# Altium PCB PICO核心.PcbDoc (part 1 of 2)
Units mil, origin at the board's own origin, x right, y up, seen from the top; angles counter-clockwise.
Board outline 3937.01 x 3543.31 mil, 4 copper layers (Top Layer, GND, VCC, Bottom Layer), stack 23.756 mil thick; 147 components, 105 nets, 477 pads, 202 vias.
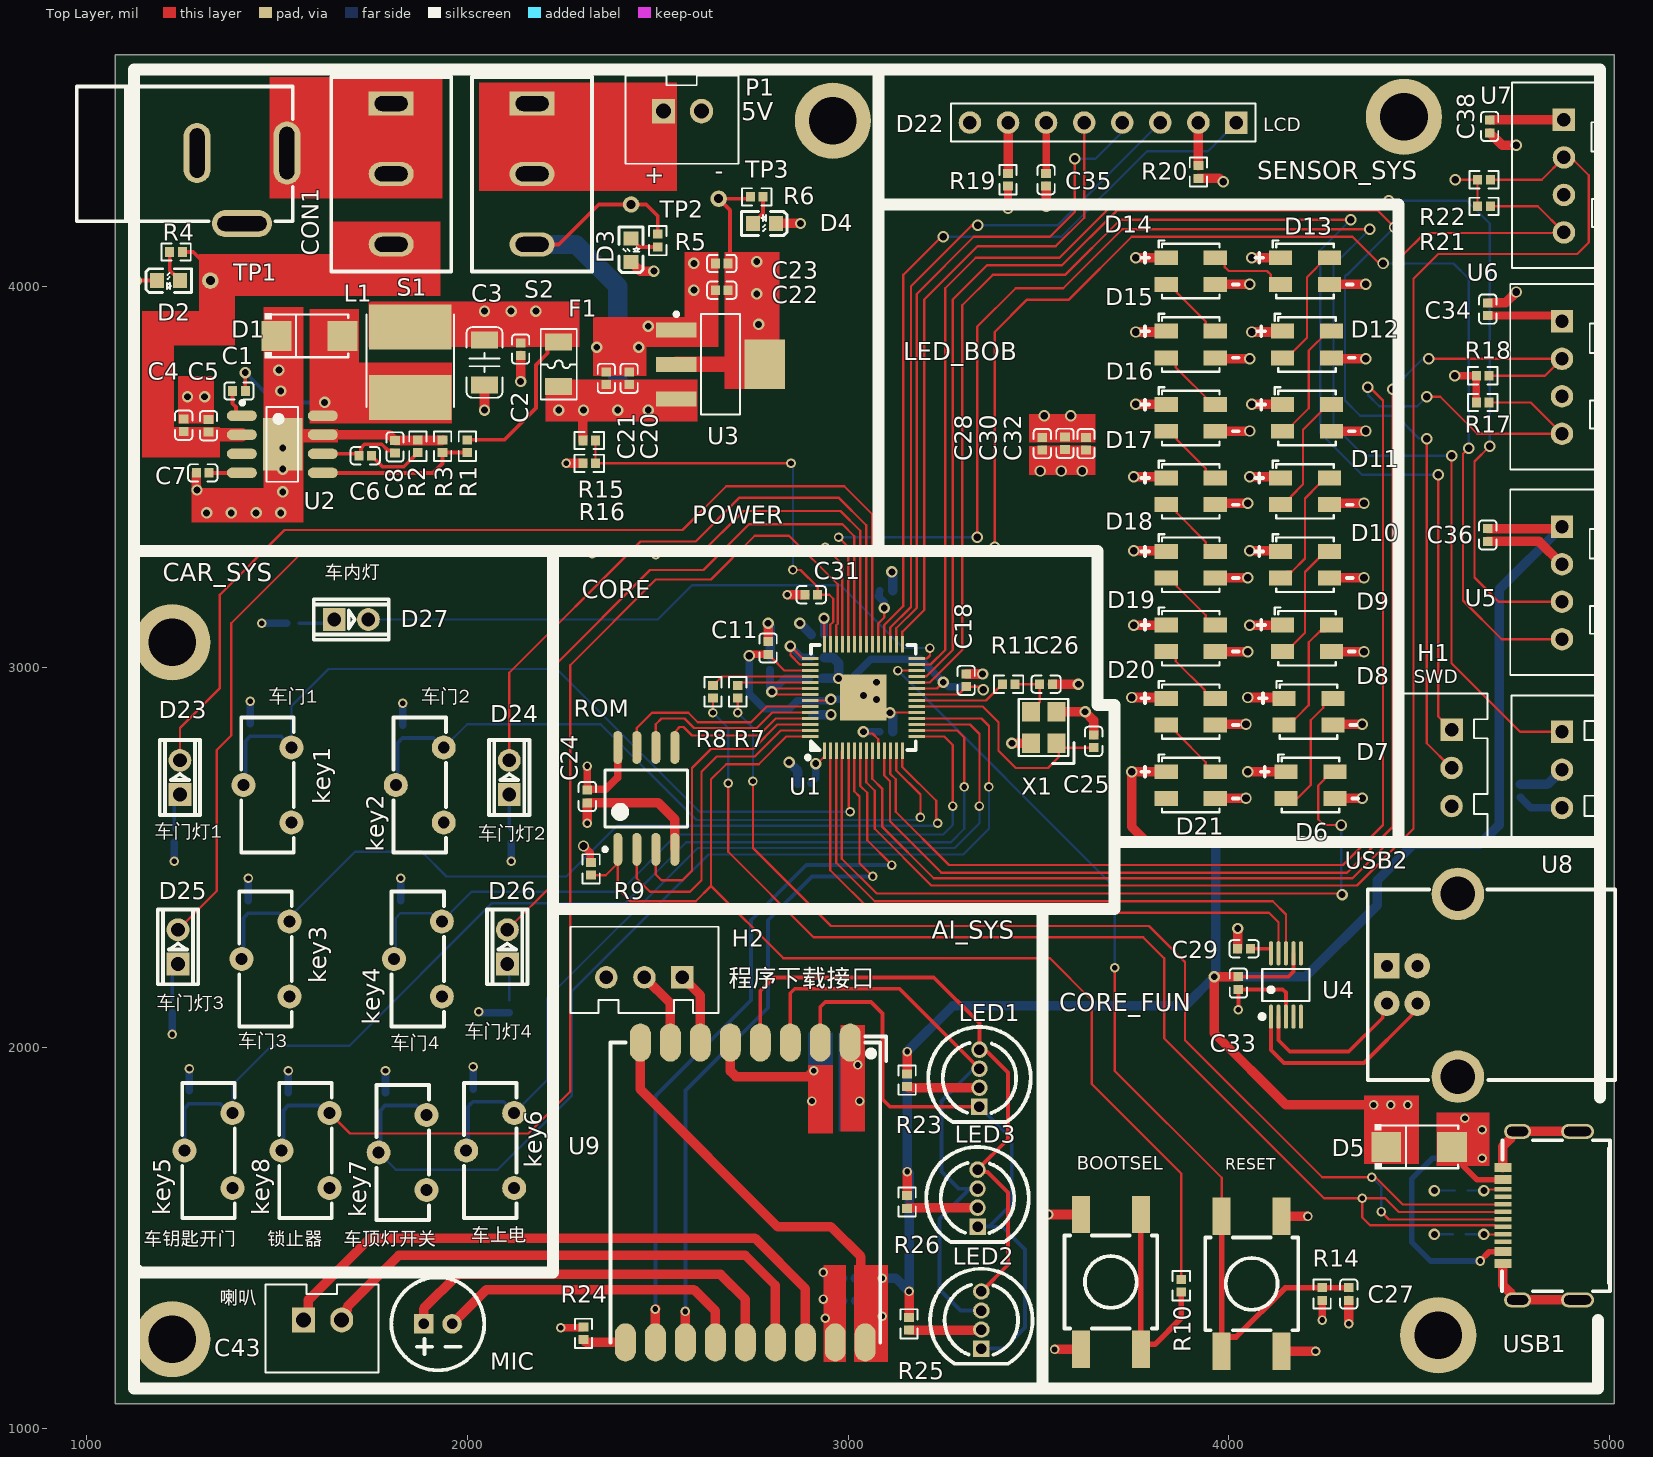
[diagram p0: Top Layer view]
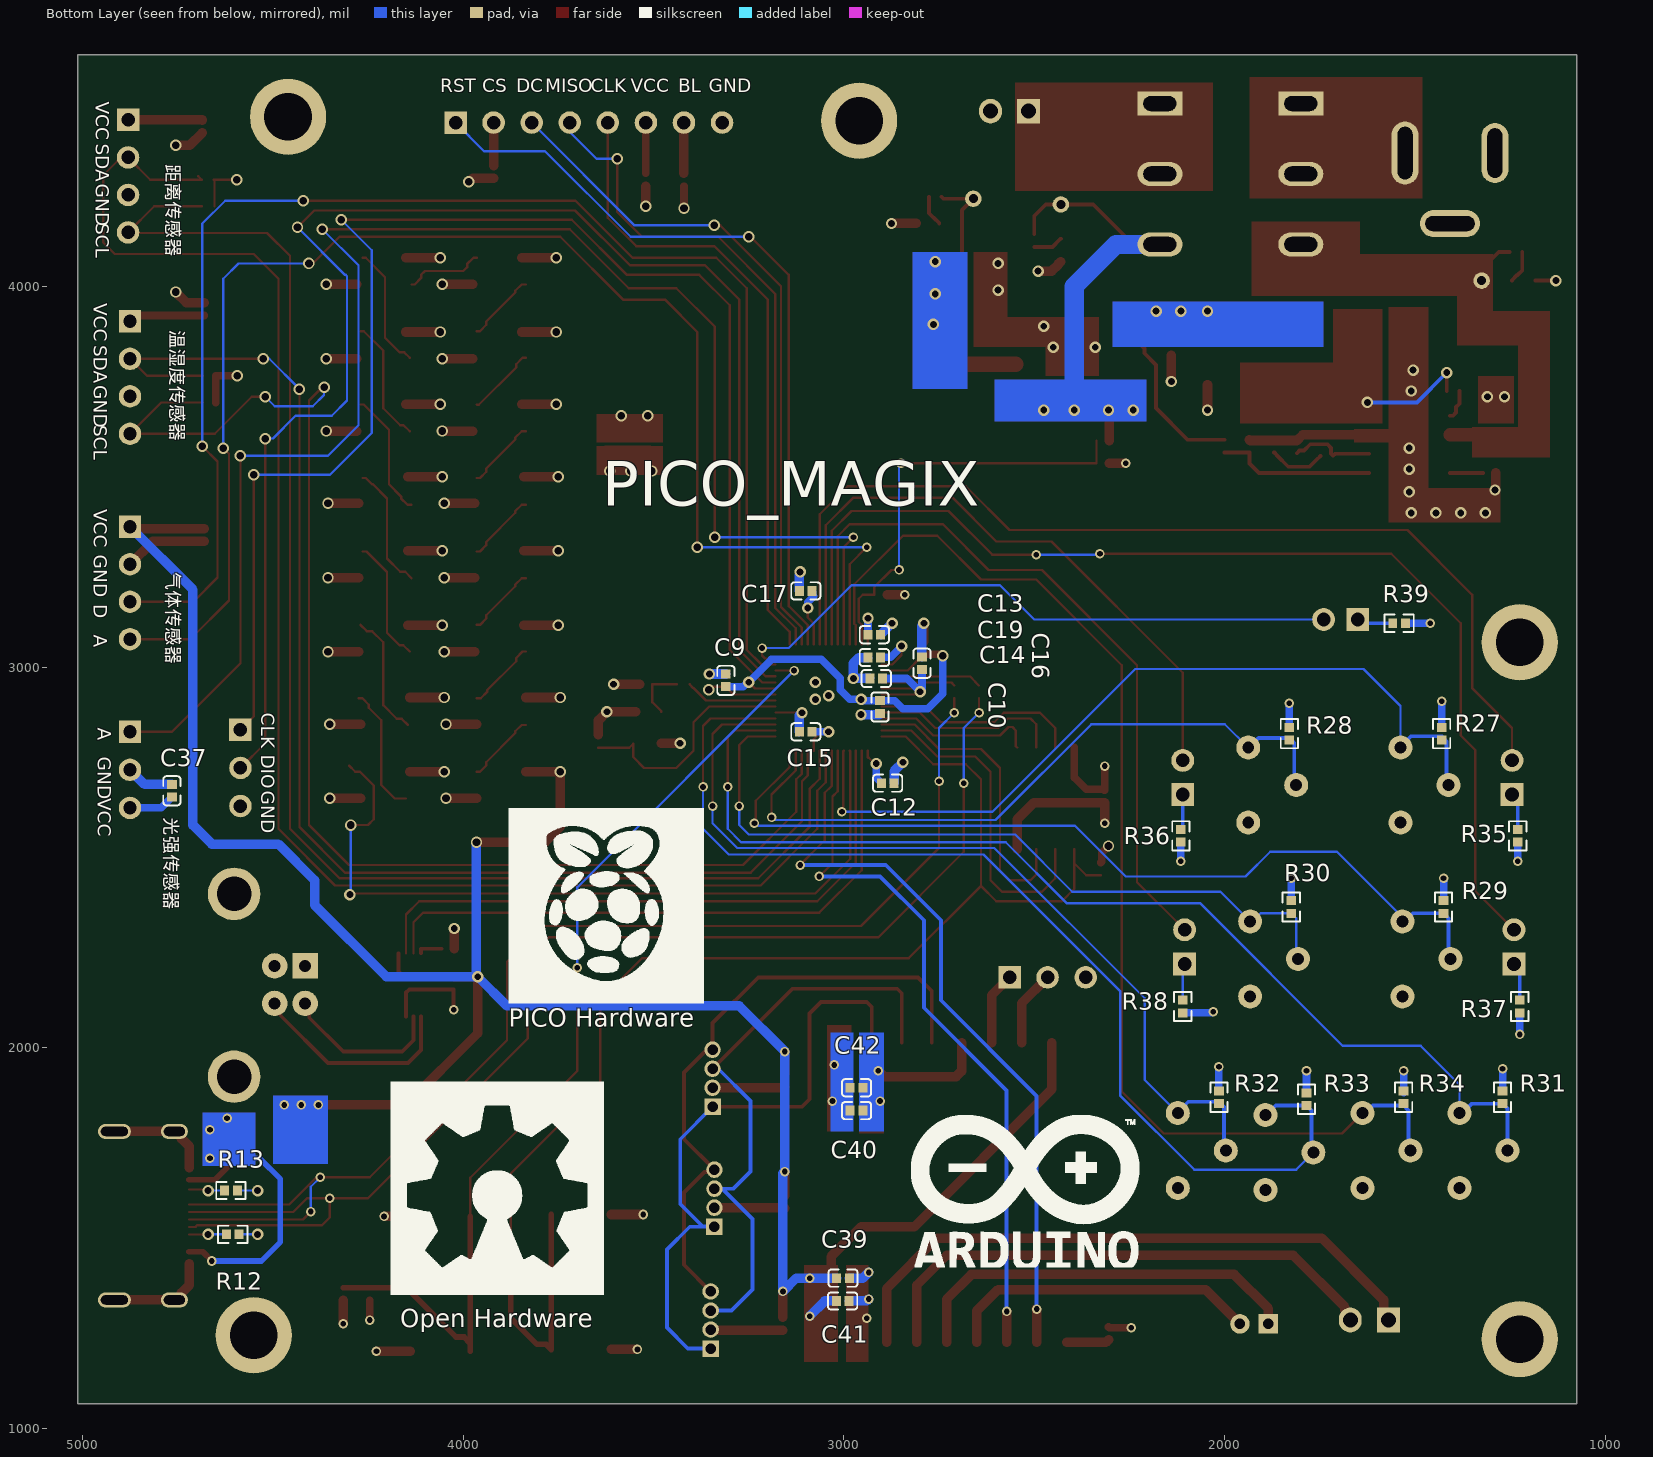
[diagram p1: Bottom Layer view, seen from below]
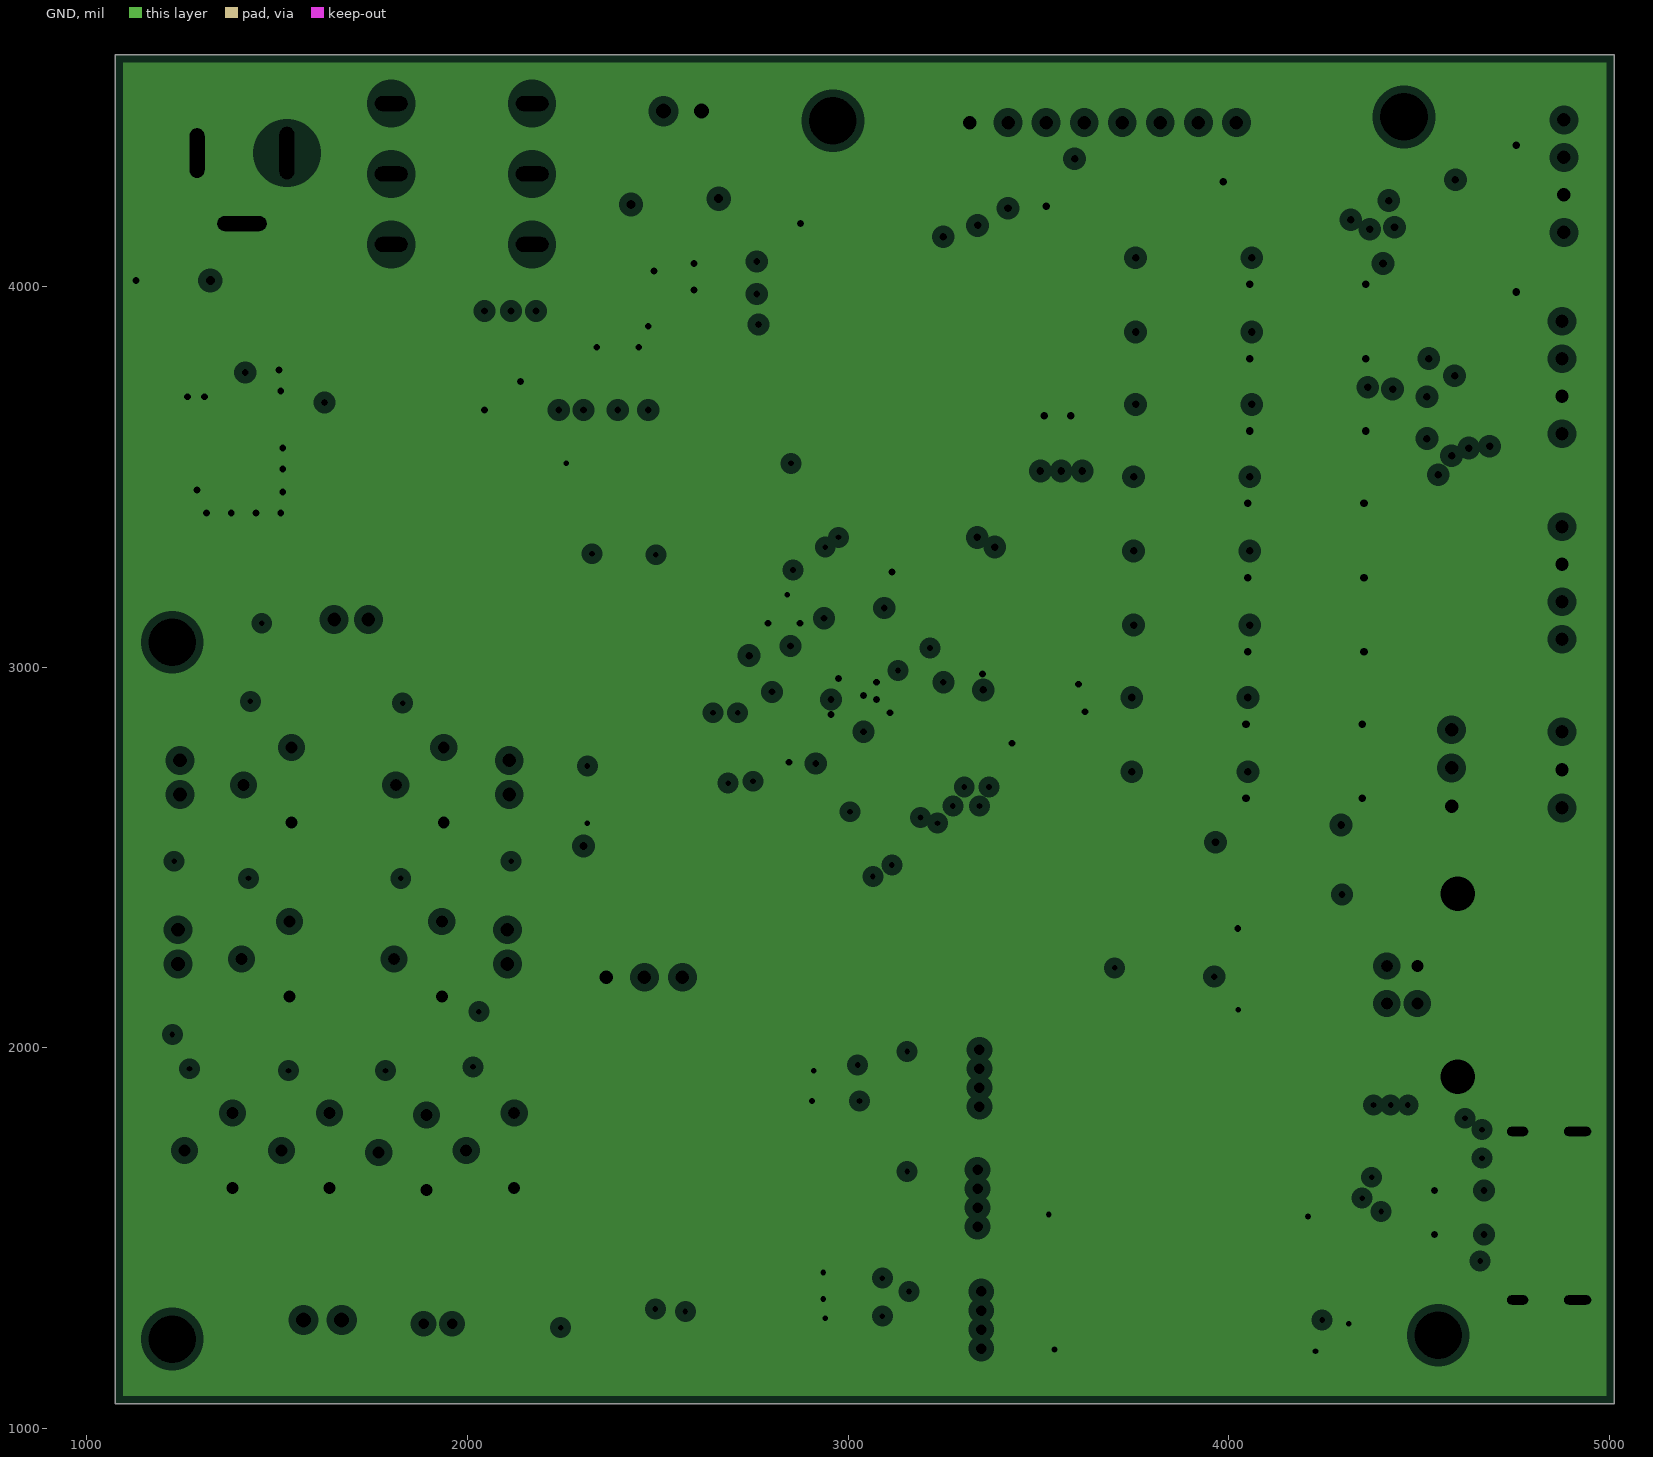
[diagram p2: GND, clearances drawn from the general rule]
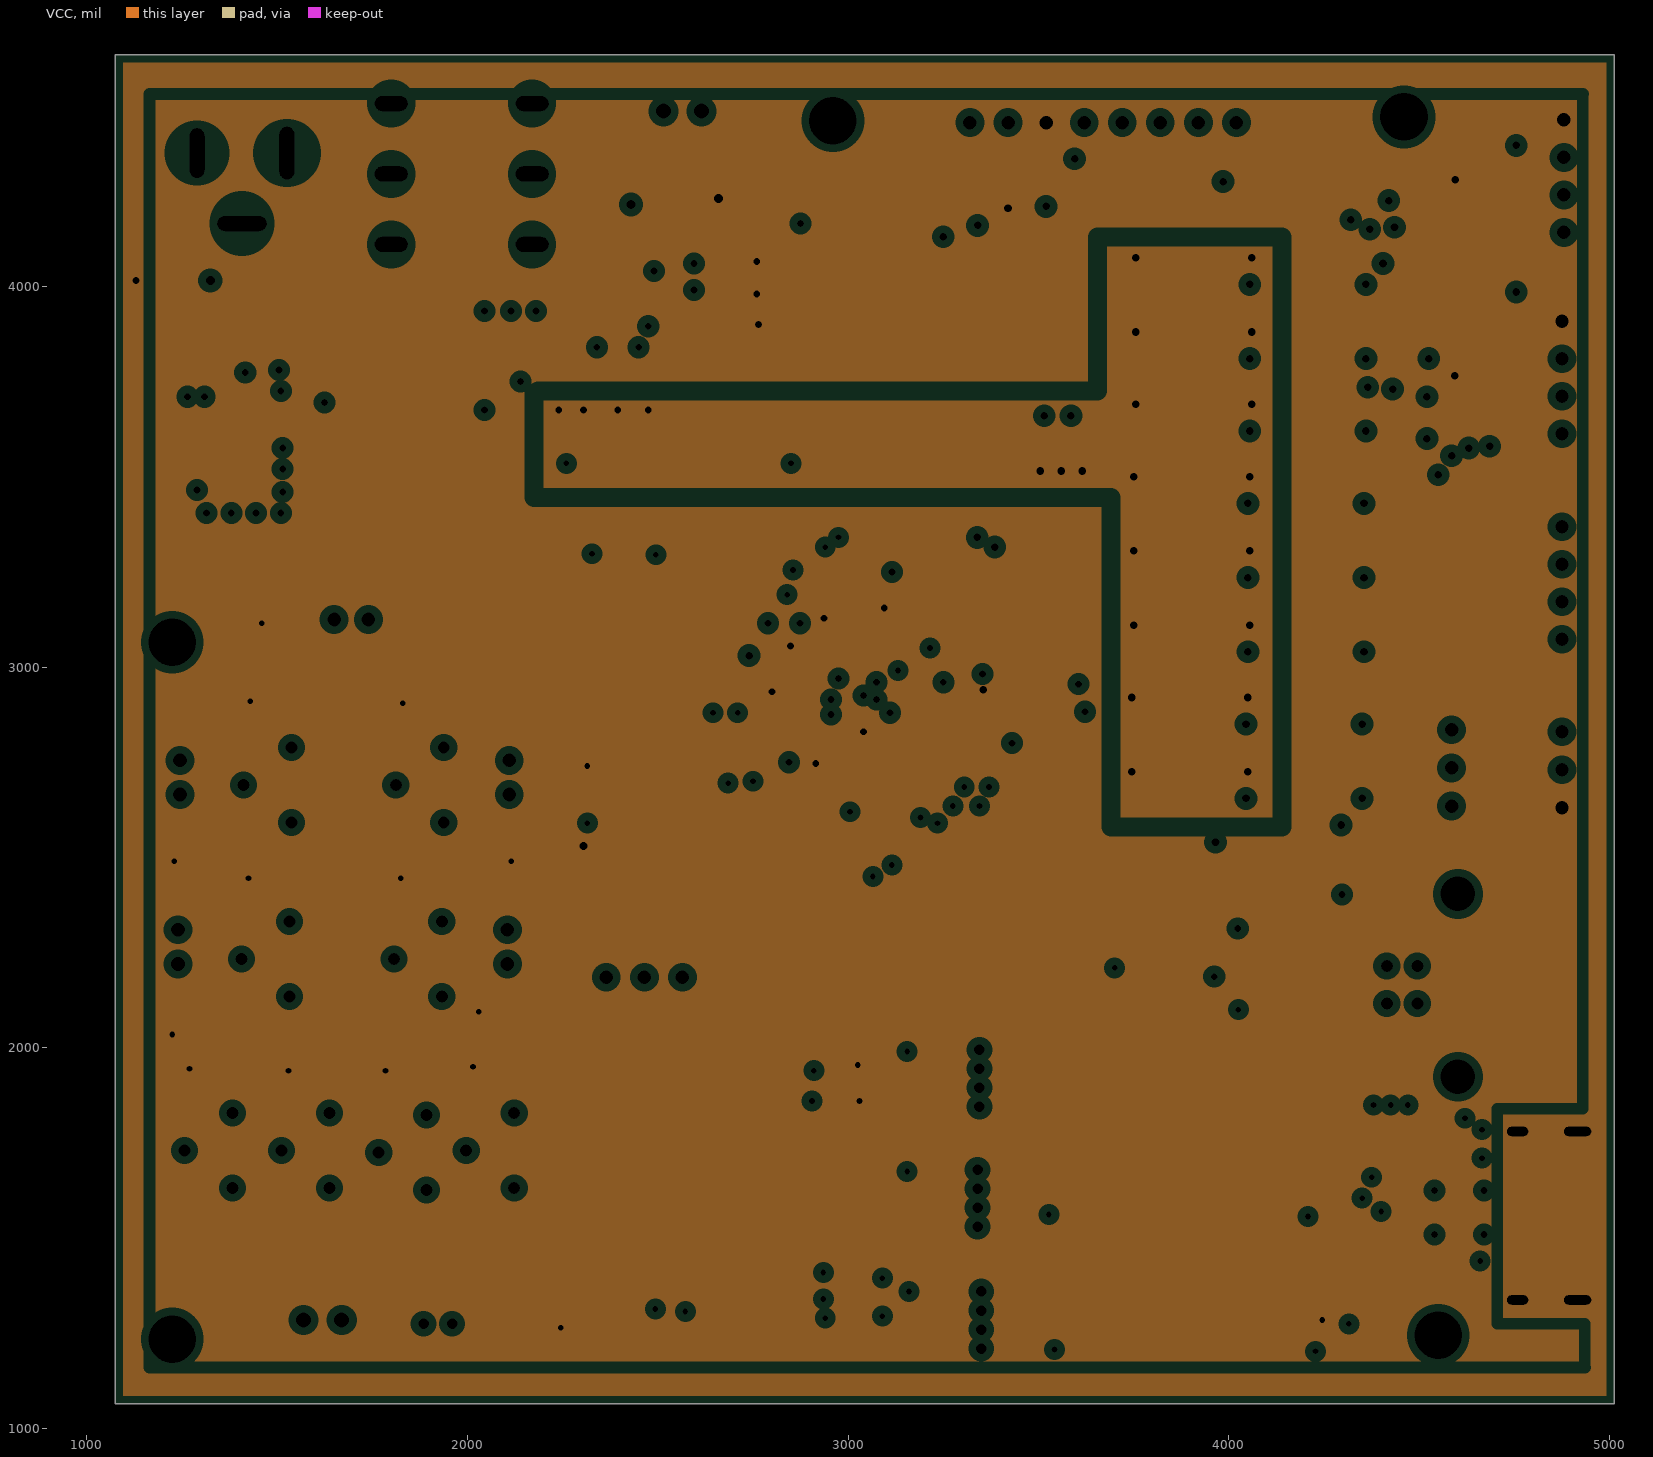
[diagram p3: VCC, clearances drawn from the general rule]
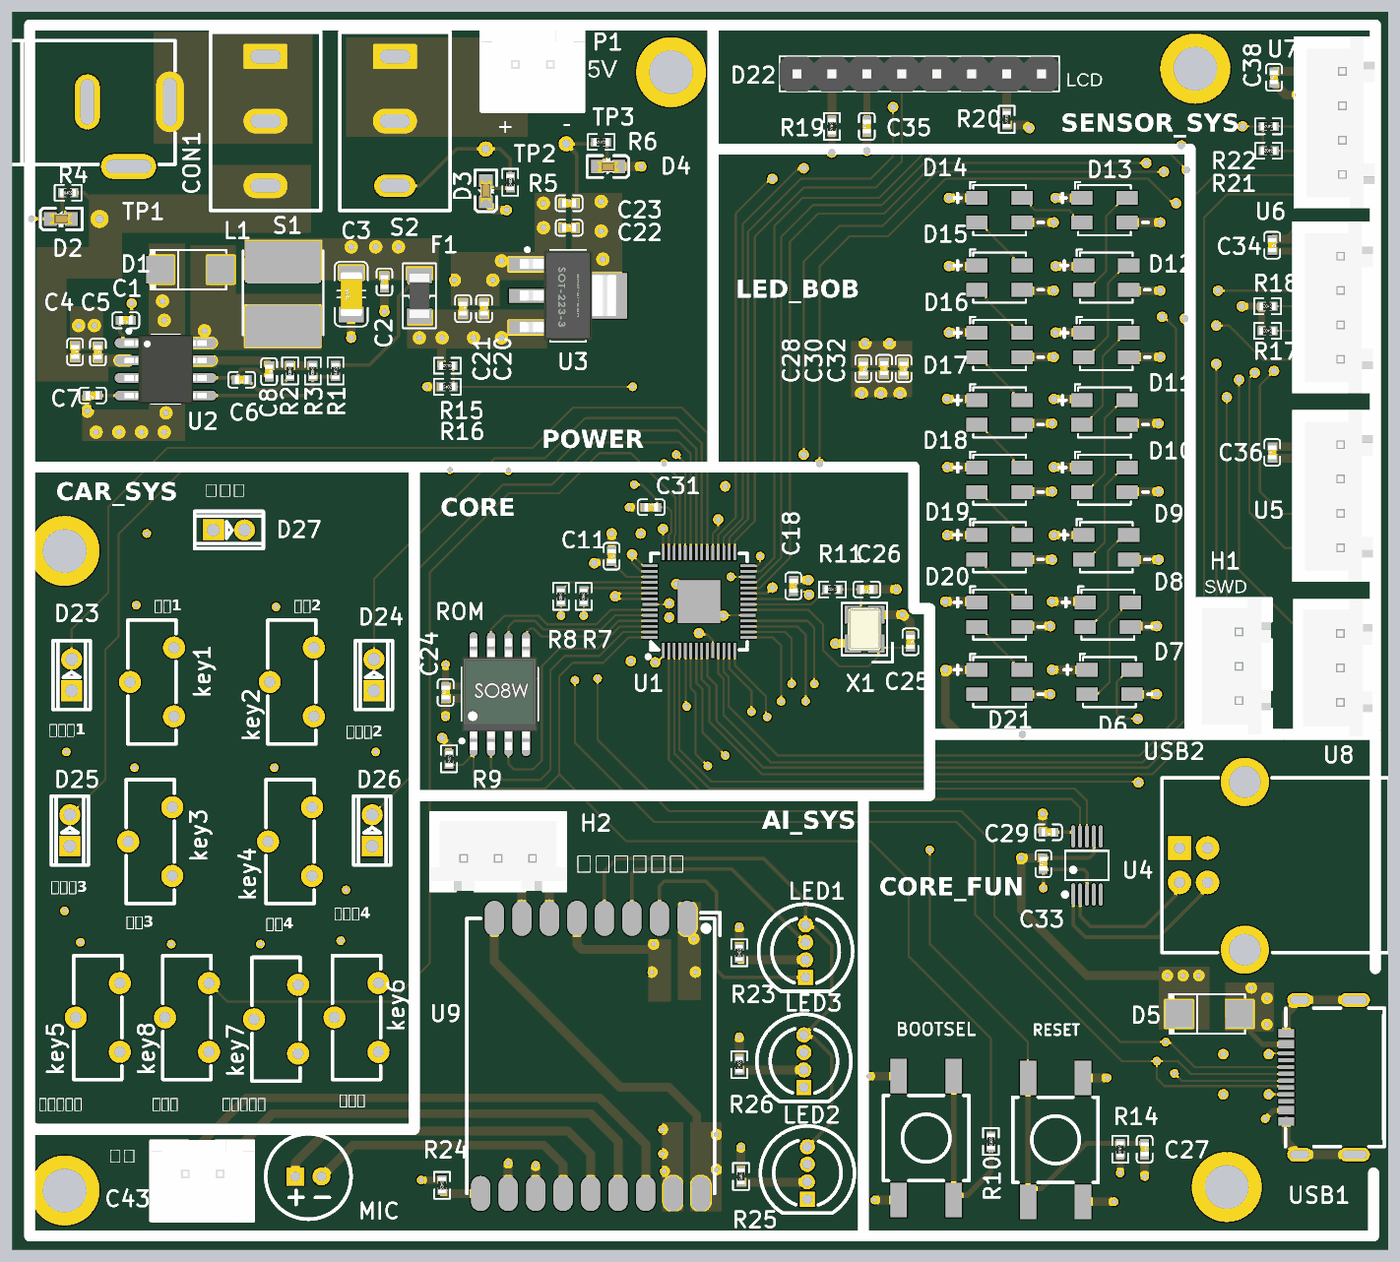
[diagram p5: 3D render of the assembled board from above, using the file's embedded part models]
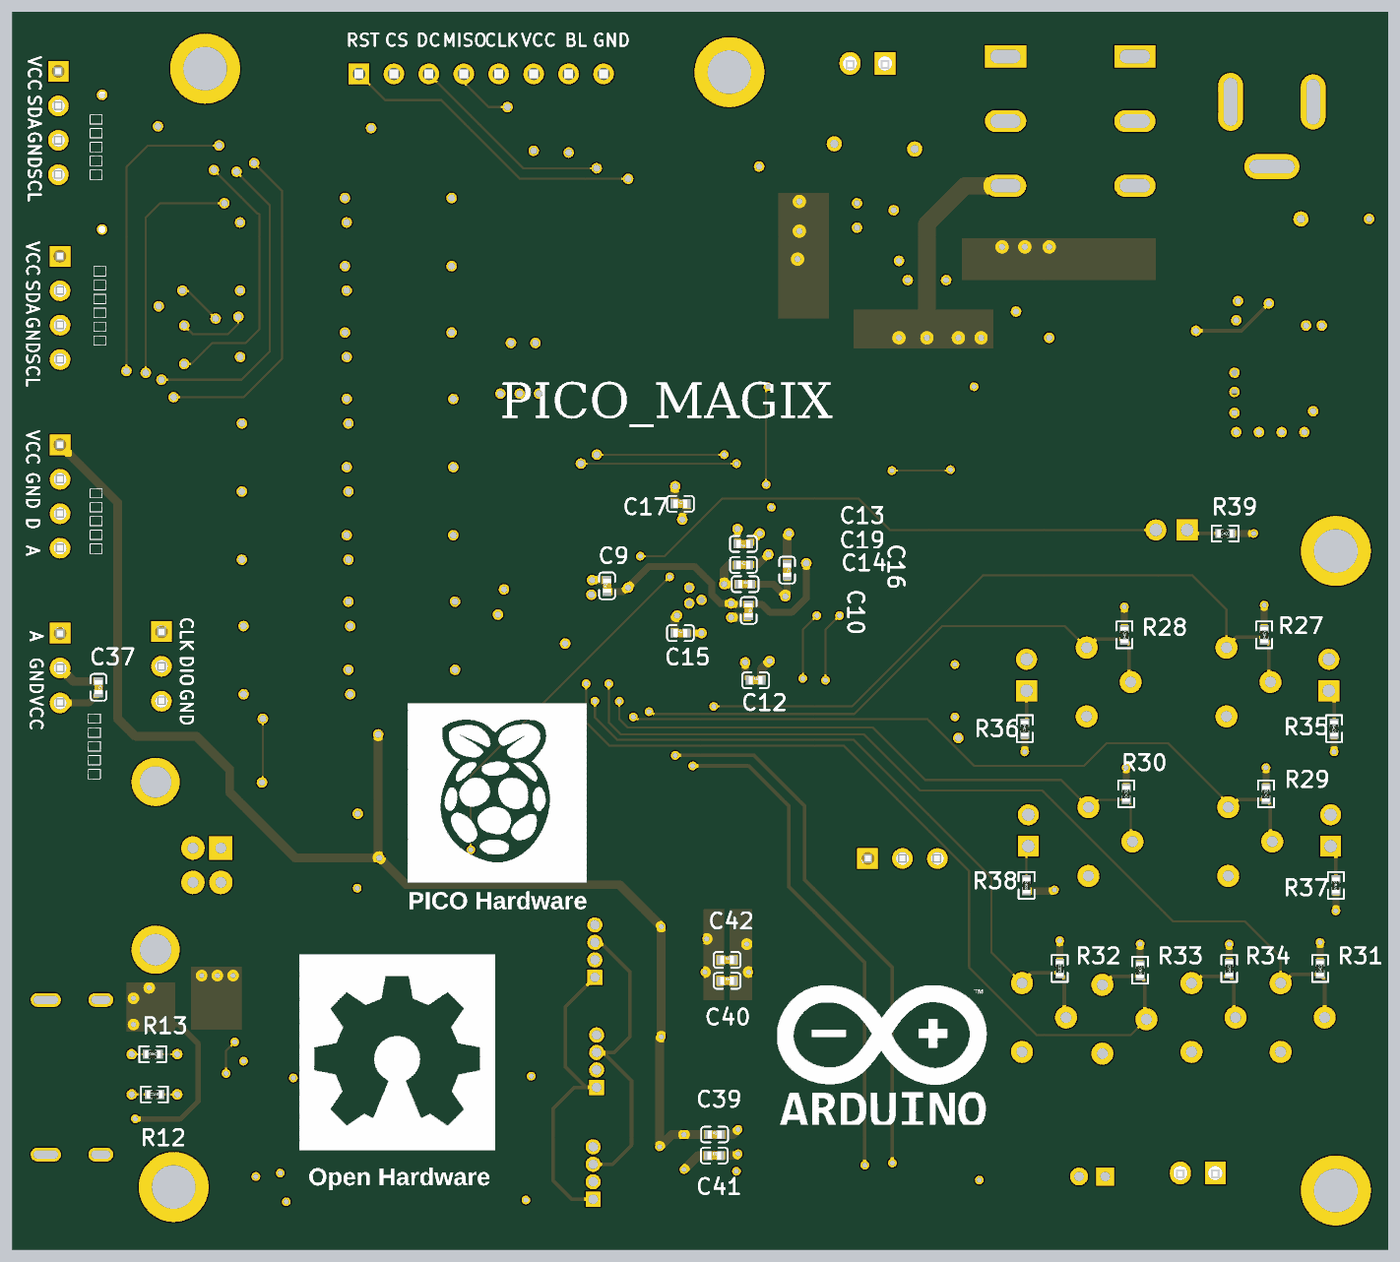
[diagram p6: 3D render of the assembled board from below, using the file's embedded part models]

## Layer stack, top to bottom
Top Solder: solder mask 0.4, Solder Resist, Dk 3.5
Top Layer: signal copper 1.4
Dielectric 2: prepreg 2.8, PP-006, Dk 4.1
GND: plane copper 1.3779, net GND
Dielectric 1: dielectric 12.6, FR-4, Dk 4.8
VCC: plane copper 1.3779, net (Multiple Nets)
Dielectric 3: prepreg 2.8, PP-006, Dk 4.1
Bottom Layer: signal copper 1.4
Bottom Solder: solder mask 0.4, Solder Resist, Dk 3.5

## Board outline
1075,1065 5012.01,1065 5012.01,4608.31 1075,4608.31

## Design rules (kind name [scope] priority, off if disabled: settings)
Clearance [All] p1: gap=6 ignorepadtopadclearanceinfootprint=FALSE
HoleSize [All] p1: absolutevalues=TRUE maxlimit=200 minlimit=1 maxpercent=80.000 minpercent=20.000
PlaneClearance [All] p1: clearance=20
PlaneConnect [All] p1: planeconnectstyle=Relief reliefexpansion=20 reliefentries=4 reliefconductorwidth=10 reliefairgap=10
PolygonConnect [All] p1: connectstyle=Relief reliefconductorwidth=10 reliefentries=4 polygonreliefangle="90 Angle" airgapwidth=10
RoutingVias [All] p1: holewidth=28 width=50 viastyle="Through Hole" minholewidth=28 minwidth=50 maxholewidth=28 maxwidth=50
SolderMaskExpansion [All] p1: expansion=4
Width [All] p1: maxlimit=100 minlimit=6 preferedwidth=10 minimp=50.000000 maximp=50.000000 favimp=50.000000
27 further rules are at their usual default settings.

## Classes and differential pairs
component class 车门车灯子系统: D23 D24 D25 D26 D27 key1 key2 key3 key4 key5 key6 key7 key8 R27 R28 R29 R30 R31 R32 R33 R34 R35 R36 R37 R38 R39
component class 语音识别系统: C39 C40 C41 C42 C43 H2 LED1 LED2 LED3 MIC R23 R24 R25 R26 U9
component class 环境监测系统: C34 C35 C36 C37 C38 D22 R17 R18 R19 R20 R21 R22 U5 U6 U7 U8
component class 传感器: C28 C29 C30 C31 C32 C33 D6 D7 D8 D9 D10 D11 D12 D13 D14 D15 D16 D17 D18 D19 D20 D21 R15 R16 U4 USB2
component class PICO核心: BOOTSEL C1 C2 C3 C4 C5 C6 C7 C8 C9 C10 C11 C12 C13 C14 C15 C16 C17 C18 C19 C20 C21 C22 C23 C24 C25 C26 C27 CON1 D1 D2 D3 D4 D5 F1 H1 L1 P1 R1 R2 R3 R4 R5 R6 R7 R8 R9 R10 R11 R12 R13 R14 RESET ROM S1 S2 TP1 TP2 TP3 U1 U2 U3 USB1 X1

## Components (designator, comment, footprint, x,y, rotation, side; value= is the part's Value field where it differs from the comment)
BOOTSEL "TSA343G00-250J2" SW-SMD_4P-L6.2-W6.3-P4.00-LS9.4 3690,1385 r270 top (schematic designator BOOTSEL1)
C1 "T_Cap_0603_0.1uF_25V_X5R" 0402_C 1400,3725 r180 top value=0.1uF,25V
C2 "T_Cap_1206_47uF_10V_X5R" 0402_C 2140,3835 r90 top value=10uF,10V
C3 "T_Cap_1206_47uF_10V_X5R" 1206_C 2045,3800 r90 top value=0.1uF,10V
C4 "T_Cap_0603_10uF_16V_X5R" 0402_C 1255,3635 r270 top value=10uF,16V
C5 "T_Cap_0603_0.1uF_25V_X5R" 0402_C 1320.14,3633.86 r270 top value=0.1uF,25V
C6 "4.7nF" 0402_C 1731.73,3555 r180 top
C7 "T_Cap_0603_10nF_50V_X7R" 0402_C 1305,3510 r180 top value=10nF,50V
C8 "39pF" 0402_C 1810,3578.27 r270 top
C9 "0.1u" 0402_C 3310,2965 r90 bottom
C10 "0.1u" 0402_C 2905,2895 r270 bottom
C11 "1u" 0402_C 2790,3050 r270 top
C12 "0.1u" 0402_C 2885,2695 r180 bottom
C13 "0.1u" 0402_C 2920,3085 r0 bottom
C14 "0.1u" 0402_C 2915,2970 r180 bottom
C15 "0.1u" 0402_C 3100,2830 r180 bottom
C16 "0.1u" 0402_C 2795,3010 r270 bottom
C17 "0.1u" 0402_C 3100,3200 r180 bottom
C18 "0.1u" 0402_C 3310,2965 r270 top
C19 "1u" 0402_C 2920,3025 r180 bottom
C20 "T_Cap_0603_10uF_16V_X5R" 0402_C 2425,3758.27 r270 top value=10uF,16V
C21 "T_Cap_0603_0.1uF_25V_X5R" 0402_C 2365,3758.27 r270 top value=0.1uF,25V
C22 "T_Cap_0603_10uF_16V_X5R" 0402_C 2668.27,3989.72 r0 top value=10uF,16V
C23 "T_Cap_0603_0.1uF_25V_X5R" 0402_C 2668.27,4060 r0 top value=0.1uF,25V
C24 "T_Cap_0603_0.1uF_25V_X5R" 0402_C 2315,2660 r90 top value=0.1uF,25V
C25 "15p" 0402_C 3645,2805 r270 top
C26 "15p" 0402_C 3520,2955 r180 top
C27 "T_Cap_0603_0.1uF_25V_X5R" 0402_C 4315,1353.27 r270 top value=0.1uF,25V
C28 "T_Cap_0603_0.1uF_25V_X5R" 0402_C 3510,3586.73 r270 top value=0.1uF,25V
C29 "10n" 0402_C 4040,2260 r180 top
C30 "T_Cap_0603_0.1uF_25V_X5R" 0402_C 3569.4,3587.58 r270 top value=47uF,25V
C31 "1n" 0402_C 2903.27,3190 r0 top
C32 "T_Cap_0603_0.1uF_25V_X5R" 0402_C 3625,3586.73 r270 top value=1uF,25V
C33 "T_Cap_0603_0.1uF_25V_X5R" 0402_C 4025,2170 r90 top value=0.1uF,25V
C34 "T_Cap_0603_0.1uF_25V_X5R" 0402_C 4680,3940 r270 top value=0.1uF,25V
C35 "T_Cap_0603_0.1uF_25V_X5R" 0402_C 3520,4280 r90 top value=0.1uF,25V
C36 "T_Cap_0603_0.1uF_25V_X5R" 0402_C 4680,3346.73 r90 top value=0.1uF,25V
C37 "T_Cap_0603_0.1uF_25V_X5R" 0402_C 4765,2675 r270 bottom value=0.1uF,25V
C38 "T_Cap_0603_0.1uF_25V_X5R" 0402_C 4685,4420 r90 top value=0.1uF,25V
C39 "T_Cap_0603_0.1uF_25V_X5R" 0402_C 3002.38,1395.03 r180 bottom value=10uF,25V
C40 "T_Cap_0603_0.1uF_25V_X5R" 0402_C 2966.73,1835 r180 bottom value=1uF,25V
C41 "T_Cap_0603_0.1uF_25V_X5R" 0402_C 3003.27,1335 r180 bottom value=0.1uF,25V
C42 "T_Cap_0603_0.1uF_25V_X5R" 0402_C 2966.73,1895 r180 bottom value=0.1uF,25V
C43 "spker" XH2.54A-2 1670,1285 r0 top
CON1 "3.5*1.3" DC-IN-TH_DC-005-5A-2.5 1408.11,4257.41 r0 top
D1 "T_SS34" SMA_L4.3-W2.6-LS5.2-RD 1585,3870 r0 top value=SS34
D2 "T_LED_Red_0805" 0603_LED 1214.68,4015 r0 top value=Red
D3 "T_LED_Red_0805" 0603_LED 2430,4094.68 r90 top value=Red
D4 "T_LED_Red_0805" 0603_LED 2780,4165 r180 top value=Red
D5 "1N4007W" SMA_L4.3-W2.6-LS5.2-RD 4500,1740 r0 top
D6 "WS2812" LED-SMD_4P-L3.5-W3.5-TL_WS2812B 4214.47,2689.96 r0 top
D7 "WS2812" LED-SMD_4P-L3.5-W3.5-TL_WS2812B 4209.47,2882.82 r0 top
D8 "WS2812" LED-SMD_4P-L3.5-W3.5-TL_WS2812B 4205,3075.69 r0 top
D9 "WS2812" LED-SMD_4P-L3.5-W3.5-TL_WS2812B 4200,3268.55 r0 top
D10 "WS2812" LED-SMD_4P-L3.5-W3.5-TL_WS2812B 4200,3461.41 r0 top
D11 "WS2812" LED-SMD_4P-L3.5-W3.5-TL_WS2812B 4205,3654.27 r0 top
D12 "WS2812" LED-SMD_4P-L3.5-W3.5-TL_WS2812B 4205,3847.14 r0 top
D13 "WS2812" LED-SMD_4P-L3.5-W3.5-TL_WS2812B 4200,4040 r0 top
D14 "WS2812" LED-SMD_4P-L3.5-W3.5-TL_WS2812B 3900,4040 r0 top
D15 "WS2812" LED-SMD_4P-L3.5-W3.5-TL_WS2812B 3900,3847.14 r0 top
D16 "WS2812" LED-SMD_4P-L3.5-W3.5-TL_WS2812B 3900,3654.27 r0 top
D17 "WS2812" LED-SMD_4P-L3.5-W3.5-TL_WS2812B 3900,3461.41 r0 top
D18 "WS2812" LED-SMD_4P-L3.5-W3.5-TL_WS2812B 3900,3268.55 r0 top
D19 "WS2812" LED-SMD_4P-L3.5-W3.5-TL_WS2812B 3900,3075.69 r0 top
D20 "WS2812" LED-SMD_4P-L3.5-W3.5-TL_WS2812B 3900,2882.82 r0 top
D21 "WS2812" LED-SMD_4P-L3.5-W3.5-TL_WS2812B 3900,2689.96 r0 top
D22 "st7735" HDR1X8 3670,4430 r180 top
D23 "T_LED_Red_0805" LED-TH_L5.0-W2.7-FD 1245,2710 r90 top value=Red
D24 "T_LED_Red_0805" LED-TH_L5.0-W2.7-FD 2110,2710 r90 top value=Red
D25 "T_LED_Red_0805" LED-TH_L5.0-W2.7-FD 1240,2265.12 r90 top value=Red
D26 "T_LED_Red_0805" LED-TH_L5.0-W2.7-FD 2105,2265.12 r90 top value=Red
D27 "T_LED_Red_0805" LED-TH_L5.0-W2.7-FD 1695.12,3125 r0 top value=yellow
F1 "16V 2A" 1206_FUSE 2240,3795 r270 top
H1 "HDR-F-2.54_1x3" XH2.54A-3 4585,2835 r270 top
H2 "HDR-F-2.54_1x3" XH2.54A-3 2565,2185 r180 top
key1 "TSA343G00-250J2" SW-TH_DEALON_MS-12D19-G2 1475,2690 r90 top
key2 "TSA343G00-250J2" SW-TH_DEALON_MS-12D19-G2 1875,2690 r90 top
key3 "TSA343G00-250J2" SW-TH_DEALON_MS-12D19-G2 1470,2233.43 r90 top
key4 "TSA343G00-250J2" SW-TH_DEALON_MS-12D19-G2 1870,2233.43 r90 top
key5 "TSA343G00-250J2" SW-TH_DEALON_MS-12D19-G2 1320,1730 r90 top
key6 "TSA343G00-250J2" SW-TH_DEALON_MS-12D19-G2 2060,1730 r90 top
key7 "TSA343G00-250J2" SW-TH_DEALON_MS-12D19-G2 1830,1725 r90 top
key8 "TSA343G00-250J2" SW-TH_DEALON_MS-12D19-G2 1575,1730 r90 top
L1 "6.8uH" IND-SMD_L5.8-W5.2 1850,3800 r270 top
LED1 "RGB-3528" LED-TH_4P-BD6.9-P1.27-R 3345,1920 r270 top
LED2 "RGB-3528" LED-TH_4P-BD6.9-P1.27-R 3350,1285 r270 top
LED3 "RGB-3528" LED-TH_4P-BD6.9-P1.27-R 3340,1605 r270 top
MIC "咪头" MIC-TH_BD6.0-P1.90-D0.4-L-RD 1922.4,1275 r0 top (schematic designator m1)
P1 "Header 2H" XH2.54A-2 2615,4460 r0 top
R1 "T_Res_0603_10k_1%_1/10W" 0402_R 2000,3580 r90 top value=10k
R2 "49.9k" 0402_R 1870,3580 r270 top
R3 "1.91k" 0402_R 1935,3580 r270 top
R4 "T_Res_0603_10k_1%_1/10W" 0402_R 1235,4090 r0 top value=10k
R5 "T_Res_0603_10k_1%_1/10W" 0402_R 2500,4120 r90 top value=10k
R6 "T_Res_0603_4.3k_5%_1/10W" 0402_R 2760,4235 r180 top value=4.3k
R7 "27" 0402_R 2710,2935 r270 top
R8 "27" 0402_R 2645,2935 r270 top
R9 "DNF（不装）" 0402_R 2325,2470 r90 top
R10 "1k" 0402_R 3875,1375 r90 top
R11 "1k" 0402_R 3421.73,2955 r180 top
R12 "1k" 0402_R 4605,1510 r0 bottom
R13 "1k" 0402_R 4610,1625 r0 bottom
R14 "10k" 0402_R 4245,1353.27 r270 top
R15 "200k" 0402_R 2320,3595 r180 top
R16 "100k" 0402_R 2320,3535 r0 top
R17 "1k" 0402_R 4666.73,3694.72 r180 top
R18 "1k" 0402_R 4666.73,3765 r180 top
R19 "1k" 0402_R 3420,4280 r270 top
R20 "10k" 0402_R 3920,4300 r270 top
R21 "1k" 0402_R 4670,4210 r180 top
R22 "1k" 0402_R 4670,4280 r180 top
R23 "100r" 0402_R 3155,1915 r90 top
R24 "4.7k" 0402_R 2305,1250 r270 top
R25 "100r" 0402_R 3160,1275 r90 top
R26 "100r" 0402_R 3155,1595 r90 top
R27 "T_Res_0603_4.3k_5%_1/10W" 0402_R 1430,2825 r90 bottom value=4.3k
R28 "T_Res_0603_4.3k_5%_1/10W" 0402_R 1830,2825 r90 bottom value=4.3k
R29 "T_Res_0603_4.3k_5%_1/10W" 0402_R 1425,2370 r90 bottom value=4.3k
R30 "T_Res_0603_4.3k_5%_1/10W" 0402_R 1825,2370 r90 bottom value=4.3k
R31 "T_Res_0603_4.3k_5%_1/10W" 0402_R 1270,1870 r90 bottom value=4.3k
R32 "T_Res_0603_4.3k_5%_1/10W" 0402_R 2015,1870 r90 bottom value=4.3k
R33 "T_Res_0603_4.3k_5%_1/10W" 0402_R 1785,1865 r90 bottom value=4.3k
R34 "T_Res_0603_4.3k_5%_1/10W" 0402_R 1530,1870 r90 bottom value=4.3k
R35 "T_Res_0603_4.3k_5%_1/10W" 0402_R 1230,2556.73 r270 bottom value=4.3k
R36 "T_Res_0603_4.3k_5%_1/10W" 0402_R 2115,2556.73 r270 bottom value=4.3k
R37 "T_Res_0603_4.3k_5%_1/10W" 0402_R 1225,2108.27 r270 bottom value=4.3k
R38 "T_Res_0603_4.3k_5%_1/10W" 0402_R 2110,2108.27 r270 bottom value=4.3k
R39 "T_Res_0603_4.3k_5%_1/10W" 0402_R 1541.73,3115 r180 bottom value=4.3k
RESET "TSA343G00-250J2" SW-SMD_4P-L6.2-W6.3-P4.00-LS9.4 4060,1380 r270 top (schematic designator RESET1)
ROM "W25Q16JVSSIQ" SOIC8-208mil 2470,2655 r90 top (schematic designator ROM1)
S1 "SS-12F23" SW-TH_MT-0-103-A101-M200-RS 1800,4295 r270 top
S2 "SS-12F23" SW-TH_MT-0-103-A101-M200-RS 2170,4295 r270 top
TP1 "T_TestPoint_H" TP_H 1325,4015 r0 top
TP2 "T_TestPoint_H" TP_H 2430,4215 r90 top
TP3 "T_TestPoint_H" TP_H 2660,4230 r180 top
U1 "PICO" LQFN-56_L7.0-W7.0-P0.4-EP 3040,2920 r90 top
U2 "TPS54331DR" SOIC8E 1515,3585 r0 top
U3 "T_AMS1117-3.3V" SOT223 2665,3795 r0 top value=AMS1117-3.3V
U4 "CH340E" MSOP-10_L3.0-W3.0-P0.50-LS5.0-BL 4150,2165 r0 top
U5 "气体传感器" XH2.54A-4 4875,3368.43 r270 top
U6 "AHT21B" XH2.54A-4 4875,3907.9 r270 top
U7 "VL6180X" XH2.54A-4 4880,4436.85 r270 top
U8 "TEMT6000" XH2.54A-3 4875,2830 r270 top
U9 "CI-C22GS02S" SMD-17_L20.0-W1.80-CI-C22GS02S 2730,1620 r270 top
USB1 "TYPEC-302-BRP16SC08" USB-C-SMD_TYPEC-302-BRP16SC08 4817.94,1559.02 r90 top
USB2 "MICROUSB FEMALE" USB-B/S_A 4495,2165.79 r90 top
X1 "12MHz" "OSC 3225-4P" 3513.46,2841.34 r90 top

## Footprints (in the part's own frame and the unit in brackets; to place one, negate y for a bottom-side part, rotate by r counter-clockwise, add the part's x,y. Pads: shape width x height; smd on the part's side, far side on the other; paste and mask are expansions set on the pad)
0402_C [mm]
  rect 0.6x0.65 smd mask+0.051: 1(-0.425,0) 2(0.425,0)
  silkscreen extent -0.97,-0.58 0.97,0.58, body extent -0.5,-0.3 0.5,0.3, height 0.2
0402_R [mm]
  rect 0.6x0.65 smd mask+0.051: 1(-0.425,0) 2(0.425,0)
  silkscreen extent -0.97,-0.58 0.97,0.58, body extent -0.57,-0.27 0.58,0.28, height 0.41
0603_LED [mm]
  rect 0.93x0.98 smd: 1(0.77,0) 2(-0.77,0)
  silkscreen extent -1.5,-0.79 1.54,0.79, body extent -0.8,-0.4 0.8,0.4, height 0.6
1206_C [mm]
  rect 1.13x1.8 smd: 1(-1.49,0) 2(1.49,0)
  silkscreen extent -2.36,-1.2 2.35,1.2, body extent -1.6,-0.81 1.6,0.79, height 1
1206_FUSE [mm]
  rect 1.13x1.8 smd: 1(-1.49,0) 2(1.49,0)
  silkscreen extent -2.36,-1.2 2.35,1.2, body extent -1.6,-0.73 1.6,0.73, height 1.63
DC-IN-TH_DC-005-5A-2.5 [mm]
  oval 1.8x4.2 hole 1 slot 3.5 at 90 deg: 1(3,2.352)
  oval 1.8x4 hole 1 slot 3.3 at 90 deg: 2(-3,2.352)
  oval 4x1.8 hole 1 slot 3.3 at 0 deg: 3(0,-2.352)
  silkscreen extent -11.03,-2.2 3.38,6.81
HDR1X8 [mm] "Connector; Header; 8 Position"
  rect 1.5x1.5 hole 0.9: 1(-8.89,0)
  round 1.5 hole 0.9: 2(-6.35,0) 3(-3.81,0) 4(-1.27,0) 5(1.27,0) 6(3.81,0) 7(6.35,0) 8(8.89,0)
  silkscreen extent -10.16,-1.27 10.16,1.27, body extent -10.16,-1.27 10.16,1.27, height 8.54
IND-SMD_L5.8-W5.2 [mm]
  rect 3x5.5 smd: 1(2.35,0) 2(-2.351,0)
  silkscreen extent -3.17,-2.92 2.98,2.92
LED-SMD_4P-L3.5-W3.5-TL_WS2812B [mm]
  rect 1.545x0.997 smd: 1(-1.638,0.89) 2(-1.638,-0.89) 3(1.638,-0.89) 4(1.638,0.89)
  silkscreen extent -3.3,-1.82 3.17,2.04
LED-TH_4P-BD6.9-P1.27-R [mm]
  rect 1.1x1.1 hole 0.7: 1(1.905,0)
  round 1.1 hole 0.7: 2(0.635,0) 3(-0.635,0) 4(-1.905,0)
  silkscreen extent -3.42,-3.42 2.92,3.42
LED-TH_L5.0-W2.7-FD [mil]
  rect 60x60 hole 36: 1(-44.88,0)
  round 60 hole 36: 2(44.88,0)
  silkscreen extent -98,-53 98,53
LQFN-56_L7.0-W7.0-P0.4-EP [mm]
  rect 1.1x0.2 smd: 1(-3.55,2.6) 2(-3.55,2.2) 3(-3.55,1.8) 4(-3.55,1.4) 5(-3.55,1) 6(-3.55,0.6) 7(-3.55,0.2) 8(-3.55,-0.2) 9(-3.55,-0.6) 10(-3.55,-1) 11(-3.55,-1.4) 12(-3.55,-1.8) 13(-3.55,-2.2) 14(-3.55,-2.6) 29(3.55,-2.6) 30(3.55,-2.2) 31(3.55,-1.8) 32(3.55,-1.4) 33(3.55,-1) 34(3.55,-0.6) 35(3.55,-0.2) 36(3.55,0.2) 37(3.55,0.6) 38(3.55,1) 39(3.55,1.4) 40(3.55,1.8) 41(3.55,2.2) 42(3.55,2.6)
  rect 0.2x1.1 smd: 15(-2.6,-3.55) 16(-2.2,-3.55) 17(-1.8,-3.55) 18(-1.4,-3.55) 19(-1,-3.55) 20(-0.6,-3.55) 21(-0.2,-3.55) 22(0.2,-3.55) 23(0.6,-3.55) 24(1,-3.55) 25(1.4,-3.55) 26(1.8,-3.55) 27(2.2,-3.55) 28(2.6,-3.55) 43(2.6,3.55) 44(2.2,3.55) 45(1.8,3.55) 46(1.4,3.55) 47(1,3.55) 48(0.6,3.55) 49(0.2,3.55) 50(-0.2,3.55) 51(-0.6,3.55) 52(-1,3.55) 53(-1.4,3.55) 54(-1.8,3.55) 55(-2.2,3.55) 56(-2.6,3.55)
  rect 3.1x3.1 smd: 57(0,0)
  silkscreen extent -4.13,-3.5 3.5,3.83
MIC-TH_BD6.0-P1.90-D0.4-L-RD [mm]
  rect 1.3x1.3 hole 0.7: 1(-0.95,0)
  round 1.3 hole 0.7: 2(0.95,0)
  silkscreen extent -3.1,-3.1 3.1,3.1
MSOP-10_L3.0-W3.0-P0.50-LS5.0-BL [mm]
  oval 0.28x1.62 smd: 1(-1,-2.11) 2(-0.5,-2.11) 3(0,-2.11) 4(0.5,-2.11) 5(1,-2.11) 6(1,2.11) 7(0.5,2.11) 8(0,2.11) 9(-0.5,2.11) 10(-1,2.11)
  silkscreen extent -1.74,-2.26 1.58,1.07
"OSC 3225-4P" [mm] "3.2*2.5*0.7mm(长宽高)"
  rect 1.3x1.2 smd: 1(-1.05,-0.85) 2(1.05,-0.85) 3(1.05,0.85) 4(-1.05,0.85)
  silkscreen extent -2.41,-2.03 1.91,1.65, body extent -1.6,-1.25 1.6,1.25, height 0.7
SMA_L4.3-W2.6-LS5.2-RD [mm]
  rect 2x2 smd: 1(-2.2,0) 2(2.2,0)
  silkscreen extent -2.98,-1.5 2.6,1.5
SMD-17_L20.0-W1.80-CI-C22GS02S [mm]
  oval 2.54x1.4 smd: 1(-10,7) 2(-10,5) 3(-10,3) 4(-10,1) 5(-10,-1) 6(-10,-3) 7(-10,-5) 8(-10,-7) 9(10,-8) 10(10,-6) 11(10,-4) 12(10,-2) 13(10,0) 14(10,2) 15(10,4) 16(10,6) 17(10,8)
  silkscreen extent -10.41,-9 10,9.4
SOIC8-208mil [mm] "SOIC8, 208mil, 8-Leads, Body 5.28x5.28mm, Pitch 1.27mm"
  oval 2.2x0.6 smd: 1(-3.4,1.905) 2(-3.4,0.635) 3(-3.4,-0.635) 4(-3.4,-1.905) 5(3.4,-1.905) 6(3.4,-0.635) 7(3.4,0.635) 8(3.4,1.905)
  silkscreen extent -3.52,-2.75 1.9,2.88, body extent -4.05,-2.73 4.05,2.73, height 1.75
SOIC8E [mm]
  oval 2x0.7 smd: 1(-2.725,1.905) 2(-2.725,0.635) 3(-2.725,-0.635) 4(-2.725,-1.905) 5(2.675,-1.905) 6(2.675,-0.635) 7(2.675,0.635) 8(2.675,1.905)
  rect 2.62x3.51 smd: 9(0,0)
  silkscreen extent -2.82,-2.5 1.02,2.89, body extent -3.03,-2.5 2.97,2.5, height 1.75
SOT223 [mm] "SOT223, 4-Leads, Body 6.50x7.00mm (avg), Pitch 2.30mm, IPC Low Density"
  rect 2.7x1 smd: 1(-2.95,2.3) 2(-2.95,0) 3(-2.95,-2.3)
  rect 2.7x3.3 smd: 4(2.95,0)
  silkscreen extent -3.07,-3.35 1.3,3.47, body extent -3.5,-3.22 3.5,3.28, height 1.7
SW-SMD_4P-L6.2-W6.3-P4.00-LS9.4 [mm]
  rect 2.5x1.2 smd: 1(-4.5,-2) 1(4.5,-2) 2(-4.5,2) 2(4.5,2)
  silkscreen extent -3.1,-3.1 3.1,3.1
SW-TH_DEALON_MS-12D19-G2 [mm]
  round 1.6 hole 0.8: 1(-2.5,-1.6) 2(0,1.6) 2(2.5,-1.6)
  silkscreen extent -4.5,-1.75 4.5,1.75
SW-TH_MT-0-103-A101-M200-RS [mm]
  rect 1.6x3 hole 1 slot 2.2 at 90 deg: 1(-4.7,0)
  oval 1.6x3 hole 1 slot 2.2 at 90 deg: 2(0,0) 3(4.7,0)
  silkscreen extent -6.48,-4 6.5,4
TP_H [mm] "测试点-过孔"
  round 1.1 hole 0.6: 1(0,0)
USB-B/S_A [mm] "b型USB 母座 16.3*13.7*11mm"
  round 3.5 hole 2.3: 0(-6.141,-2.71) 5(6.051,-2.71)
  rect 1.7x1.7 hole 0.8: 1(1.25,2.032)
  round 1.7 hole 0.8: 2(-1.25,2.032) 3(-1.25,0) 4(1.25,0)
  silkscreen extent -6.35,-13.21 6.35,3.3, body extent -6.86,-13.16 6.86,3.14, height 11.45
USB-C-SMD_TYPEC-302-BRP16SC08 [mm]
  rect 0.6x1.15 smd: 1(-3.2,2.488) 2(-2.4,2.488) 11(2.4,2.488) 12(3.2,2.488)
  rect 0.3x1.15 smd: 3(-1.75,2.488) 4(-1.25,2.488) 5(-0.75,2.488) 6(-0.25,2.488) 7(0.25,2.488) 8(0.75,2.488) 9(1.25,2.488) 10(1.75,2.488)
  oval 1x1.8 hole 0.61 slot 1.4 at 90 deg: 13(-5.62,1.513) 14(5.62,1.513)
  oval 1x2.2 hole 0.61 slot 1.8 at 90 deg: 15(-5.62,-2.487) 16(5.62,-2.487)
  silkscreen extent -5.03,-4.65 5.03,2.55
XH2.54A-2 [mil]
  rect 60x65 hole 39.37: 1(-100.1,0)
  oval 60x65 hole 39.37: 2(0,0)
  silkscreen extent -200,-138 97,93, body extent -198,-142 98,94, height 276
XH2.54A-3 [mm]
  rect 1.5x1.5 hole 0.9: 1(0,0)
  round 1.5 hole 0.9: 2(2.54,0) 3(5.08,0)
  silkscreen extent -2.41,-3.38 7.47,2.39, body extent -2.41,-3.41 7.49,2.34, height 7
XH2.54A-4 [mm]
  rect 1.5x1.5 hole 0.9: 1(0,0)
  round 1.5 hole 0.9: 2(2.5,0) 3(5,0) 4(7.5,0)
  silkscreen extent -2.49,-3.45 9.88,2.49, body extent -2.47,-3.38 9.93,2.37, height 7

## Part data
BOOTSEL key1 key2 key3 key4 key5 key6 key7 key8 RESET: BOM_JLCPCB Part Class="Extended Part", BOM_Manufacturer=BRIGHT, BOM_Manufacturer Part=TSA343G00-250J2, BOM_Supplier=LCSC, BOM_Supplier Part=C354946, Contributor=LCSC, spicePre=S, spiceSymbolName=TSA343G00-250J2
C1 C5 C21 C23 C24 C27 C28 C30 C32 C33 C34 C35 C36 C37 C38 C39 C40 C41 C42: "贴片电容", Tolerance=10%, Withstand Voltage=25V, LibRef=T_Cap_0603_0.1uF_25V_X5R, Part Number=T_Cap_0603_0.1uF_25V_X5R, Part Typer=X5R, Schematic Path="X:\Database\Schematic Library.Schlib", Solder=SMD
C2 C3: "贴片电容", Tolerance=10%, Withstand Voltage=10V, LibRef=T_Cap_1206_47uF_10V_X5R, Part Number=T_Cap_1206_47uF_10V_X5R, Part Typer=X5R, Schematic Path="X:\Database\Schematic Library.Schlib", Solder=SMD
C4 C20 C22: "贴片电容", Tolerance=10%, Withstand Voltage=16V, LibRef=T_Cap_0603_10uF_16V_X5R, Part Number=T_Cap_0603_10uF_16V_X5R, Part Typer=X5R, Schematic Path="X:\Database\Schematic Library.Schlib", Solder=SMD
C6 C8: library part Cap
C7: "贴片电容", Tolerance=10%, Withstand Voltage=50V, LibRef=T_Cap_0603_10nF_50V_X7R, Part Number=T_Cap_0603_10nF_50V_X7R, Part Typer=X7R, Schematic Path="X:\Database\Schematic Library.Schlib", Solder=SMD
C11 C19: library part 0.1u, Contributor=LCEDA_Lib, nameAlias=Value(F), spicePre=C, spiceSymbolName=C_0603_US
C26: Package Display=No, Contributor=LCEDA_Lib, nameAlias=Value(F), spicePre=C, spiceSymbolName=C_0603_US
C43: library part SPK
CON1: library part P-DC, "低压电源接口"
D1: "肖特基二极管", LibRef=T_SS34, Part Number=T_SS34, Schematic Path="X:\Database\Schematic Library.Schlib", Solder=SMD
D2 D3 D4 D23 D24 D25 D26 D27: "红色LED灯", LibRef=T_LED_Red_0805, Part Number=T_LED_Red_0805, Schematic Path="X:\Database\Schematic Library.Schlib", Solder=SMD
D5: BOM_Manufacturer="BLUE ROCKET", BOM_Manufacturer Part=1N4007W, BOM_Supplier=LCSC, BOM_Supplier Part=C328592, Contributor=LCEDA_Lib, spicePre=D, spiceSymbolName=1N4007W
F1: library part Fuse
L1: library part Inductor
LED1 LED2 LED3: library part LED-RGB-3528, "三基色LED"
MIC: library part mic
P1: "Header, 2-Pin, Right Angle", LatestRevisionDate=17-Jul-2002, LatestRevisionNote="Re-released for DXP Platform.", Publisher="Altium Limited"
R1 R4 R5: "贴片电阻", Power=1/10W, Tolerance=1%, LibRef=T_Res_0603_10k_1%_1/10W, Part Number=T_Res_0603_10k_1%_1/10W, Schematic Path="X:\Database\Schematic Library.Schlib", Solder=SMD
R2 R3: library part Res
R6 R27 R28 R29 R30 R31 R32 R33 R34 R35 R36 R37 R38 R39: "贴片电阻", Power=1/10W, Tolerance=5%, LibRef=T_Res_0603_4.3k_5%_1/10W, Part Number=T_Res_0603_4.3k_5%_1/10W, Schematic Path="X:\Database\Schematic Library.Schlib", Solder=SMD
R14 R20: library part 1k, Contributor=LCEDA_Lib, nameAlias=Value(Ω), spicePre=R, spiceSymbolName=R_0603_EU
R23 R24 R25 R26: library part 100k, Contributor=LCEDA_Lib, nameAlias=Value(Ω), spicePre=R, spiceSymbolName=R_0603_EU
ROM: BOM_JLCPCB Part Class="Extended Part", BOM_Manufacturer=WINBOND, BOM_Manufacturer Part=W25Q16JVSSIQ, BOM_Supplier=LCSC, BOM_Supplier Part=C82317, spicePre=U, spiceSymbolName=W25Q16JVSSIQ
S1 S2: library part SSW-1P, "1路波动开关"
TP1 TP2 TP3: "测试点_过孔", LibRef=T_TestPoint_H, Part Number=T_TestPoint_H, Schematic Path="X:\Database\Schematic Library.Schlib", Solder=DIP
U1: library part PICO_CORE
U2: library part TPS54331, "TI, 3A, 3.5-28V, Buck"
U3: "电源芯片", ComponentLink2Description=Datasheet, ComponentLink2URL=X:\Database\Datasheet\AMS1117.pdf, LibRef=T_AMS1117-3.3V, Part Number=T_AMS1117-3.3V, Schematic Path="X:\Database\Schematic Library.Schlib", Solder=SMD
U4: BOM_JLCPCB Part Class="Extended Part", BOM_Manufacturer=WCH, BOM_Manufacturer Part=CH340E, BOM_Supplier=LCSC, BOM_Supplier Part=C99652, spicePre=U, spiceSymbolName=CH340E
U5: library part MQ135
U9: BOM_JLCPCB Part Class="Extended Part", BOM_Manufacturer=Chiplntelli(启?, BOM_Manufacturer Part=CI-C22GS02S, BOM_Supplier=LCSC, BOM_Supplier Part=C2759836, Contributor=LCSC, spicePre=U, spiceSymbolName=CI-C22GS02S
USB1: BOM_Manufacturer=XUNPU(Ѷ?, BOM_Manufacturer Part=TYPEC-302-BRP16SC08, BOM_Supplier=LCSC, BOM_Supplier Part=C2835312, Contributor=LCSC, spicePre=U, spiceSymbolName=TYPEC-302-BRP16SC08
USB2: BOM_JLCPCB Part Class="Extended Part", BOM_Manufacturer=ValuePro, BOM_Manufacturer Part="micro USBFemale", BOM_Supplier=LCSC, BOM_Supplier Part=C10418, spicePre=U, spiceSymbolName="MICROUSB FEMALE"
X1: BOM_JLCPCB Part Class="Extended Part", BOM_Manufacturer=YXC, BOM_Manufacturer Part=X322512MLB4SI, BOM_Supplier=LCSC, BOM_Supplier Part=C112971, nameAlias=Frequency, spicePre=X, spiceSymbolName=X322512MLB4SI
C9 C10 C12 C13 C14 C15 C16 C17 C18 C25 C29 C31: Contributor=LCEDA_Lib, nameAlias=Value(F), spicePre=C, spiceSymbolName=C_0603_US
H1 H2: BOM_Supplier=LCSC, BOM_Supplier Part=C146690, Contributor=LCEDA_Lib, spicePre=H, spiceSymbolName=HDR-F-2.54_1x3
R7 R8 R10 R11 R12 R13 R15 R16 R17 R18 R19 R21 R22: Contributor=LCEDA_Lib, nameAlias=Value(Ω), spicePre=R, spiceSymbolName=R_0603_EU
R9: Contributor=LCEDA_Lib, nameAlias=Value(Ω), spicePre=R, spiceSymbolName=R_0603_US

## Free pads (board coordinates)
  round 200 hole 125: 1(1225,1235) 1(1225,3065) 1(2960,4435) 1(4460,4445) 1(4550,1245)

## Via types
v1: diameter 25, hole 15, Top Layer to Bottom Layer, 71 vias
v2: diameter 30, hole 20, Top Layer to Bottom Layer, 68 vias
v3: diameter 30, hole 18, Top Layer to Bottom Layer, 63 vias

## Nets (pads, with @x,y where several pads share a name; then routed paths per layer and width w, separated by ;. In a path a pad name is that pad's centre, name@x,y a point inside that pad or via, vN(x,y) a via of type N, cw(c..) or ccw(c..) an arc to the next point about the centre after c; other vN are vias at no path point)
1V1: C9.1 C10.1 C11.2 U1.23 U1.45 U1.50 | length 1100.3
  Top Layer w6: C11.2@2790,3033.27 2790.98,3033.27 2799.8,3024.46 2799.8,3023.47 2832.4,2990.87 U1.45@2900.24,2990.87 ; U1.50@2900.24,2912.13 2952.13,2912.13 v3(2954.94,2914.94) ; U1.23@3179.76,2943.62 3233.62,2943.62 v3(3250,2960)
  Top Layer w20: v2(2740,3030) 2743.27,3033.27 C11.2@2790,3033.27
  Bottom Layer w20: v2(2740,3030) 2740,2930 2780,2890 2845,2890 2866.73,2911.73 C10.1@2905,2911.73 2949.03,2911.73 2952.23,2914.94 v3(2954.94,2914.94) 2984.94,2914.94 3010,2940 3010,2970 3060,3020 3190,3020 v3(3250,2960) 3252.71,2960 3264.44,2948.27 C9.1@3310,2948.27
3V3: C12.1 C13.2 C14.2 C15.2 C16.2 C17.2 C18.2 C19.2 C22.2 C23.2 C24.2 C34.2 C35.2 C37.2 C38.2 C40.1 C42.1 D22.6 R6.2 R9.2 R14.2 R17.2 R18.2 R19.2 R21.2 R22.2 R24.1 R27.2 R28.2 R29.2 R30.2 R31.2 R32.2 R33.2 R34.2 R35.2 R36.2 R37.2 R38.2 R39.2 ROM.8 TP3.1 U1.1 U1.10 U1.22 U1.33 U1.42 U1.43 U1.44 U1.48 U1.49 U3.2 U3.4 U6.1 U7.1 U8.3 U9.1 | length 3918.6
  Top Layer w6: v3@2848.43,3040.2 2848.43,3031.3 2873.11,3006.61 U1.44@2900.24,3006.61 ; v3(2848.43,3055) 2880.13,3023.3 2899.3,3023.3 U1.43@2900.24,3022.36 ; U1.49@2900.24,2927.87 2802.87,2927.87 2802.87,2943.62 U1.48@2900.24,2943.62 ; v3(2915,2746.3) 2919.73,2746.3 2935.01,2761.58 2936.7,2761.58 2937.64,2762.52 U1.1@2937.64,2780.24 ; v3(2936.73,3128.27) 2937.64,3127.36 U1.42@2937.64,3059.76 ; v3(3040,2830) 3044.59,2825.41 3064.03,2825.41 3079.37,2810.07 U1.10@3079.37,2780.24 ; U1.33@3079.37,3059.76 3079.37,3114.37 3095,3130 v3(3095,3155) ; U1.22@3179.76,2927.87 3289.61,2927.87 3300.2,2938.47 3300.2,2939.46 3309.02,2948.27 C18.2@3310,2948.27 3346.73,2948.27 v2(3355,2940) ; v2(4595,4280) R22.2@4653.27,4280 ; R21.2@4653.27,4210 4653.27,4278.27 R22.2@4655,4280 ; C38.2@4683.27,4435 C38.2@4685,4436.73
  Top Layer w10: 2690,4080 2690,4200 TP3.1@2660,4230 2738.27,4230 R6.2@2743.27,4235
  Top Layer w20: v1(2245,1265) 2303.27,1265 R24.1@2305,1266.73 ; v2(2305,2530) 2323.12,2511.88 2323.12,2488.54 2324.93,2486.73 R9.2@2325,2486.73 ; v1(2315,2740) C24.2@2315,2676.73 2315.98,2676.73 2317.8,2678.54 2363.54,2678.54 2395,2710 ROM.8@2395,2788.86 ; v3@2846.51,3056.91 v3(2848.43,3055) ; v2(3420,4205) R19.2@3420,4263.27 ; C35.2@3520,4296.73 D22.6@3520,4430 ; v1(4245,1285) R14.2@4245,1336.54 ; v2@4592.58,3765.31 v2(4592.89,3765) R18.2@4650,3765 R17.2@4650,3694.72 ; C34.2@4680,3923.27 4859.63,3923.27 U6.1@4875,3907.9
  Top Layer w25: C38.2@4685,4436.73 4685.12,4436.85 U7.1@4880,4436.85
  Top Layer w40: U3.2@2548.86,3795 U3.4@2781.14,3795 U3.4@2759.09,3817.05
  Bottom Layer w20: v1(1225,2035) R37.2@1225,2091.54 ; v1(1230,2490) R35.2@1230,2540 ; R31.2@1270,1886.73 v1(1270,1945) ; R29.2@1425,2386.73 v1(1425,2445) ; R27.2@1430,2851.73 v1(1430,2910) ; v1(1460,3115) R39.2@1525,3115 ; R34.2@1530,1881.73 v1(1530,1940) ; R33.2@1785,1881.73 v1(1785,1940) ; R30.2@1825,2386.73 v1(1825,2445) ; R28.2@1830,2846.73 v1(1830,2905) ; R32.2@2015,1891.73 v1(2015,1950) ; v1(2030,2095) 2033.46,2091.54 R38.2@2110,2091.54 ; v1(2115,2490) R36.2@2115,2540 ; C16.2@2795,2993.27 2795,2942.71 2800,2937.71 v3(2800,2935) 2835,2970 C14.2@2898.27,2970 ; v3(2848.43,3055) 2877.33,3026.1 2902.17,3026.1 C19.2@2903.27,3025 ; C12.1@2901.73,2695 2901.73,2695.98 2915,2709.25 v3(2915,2746.3) ; C13.2@2936.73,3085 v3(2936.73,3128.27) ; v3(3040,2830) C15.2@3083.27,2830 ; C17.2@3083.27,3200 3081.46,3198.19 3081.46,3187.72 3079.37,3185.64 3095,3170.01 v3(3095,3155) ; C37.2@4765,2658.27 4765.98,2658.27 4767.8,2656.46 4767.8,2655.47 4793.27,2630 U8.3@4875,2630
  other v1: 3030,1860 3025,1955
  other v3: 2765,3900 2760,3980 2760,4065
5V: C20.2 C21.2 C28.2 C30.2 C32.2 C33.2 C36.2 C39.1 C41.1 D5.1 D6.1 D7.1 D8.1 D9.1 D10.1 D11.1 D12.1 D13.1 D14.1 D15.1 D16.1 D17.1 D18.1 D19.1 D20.1 D21.1 F1.2 R5.2 R15.2 R23.2 R25.2 R26.2 S2.3 TP2.1 U3.3 U4.7 U5.1 U9.8 U9.17 | length 9202.5
  Top Layer w10: S2.3@2170,4109.96 2239.96,4109.96 2345,4215 TP2.1@2430,4215 2470,4215 2500,4185 R5.2@2500,4136.73 ; C33.2@4025,2186.73 4156.42,2186.73 4169.69,2200 U4.7@4169.69,2248.07
  Top Layer w25: R15.2@2303.27,3595 2303.27,3673.27 v3(2305,3675) ; U9.8@2454.41,2013.7 2454.41,1890.59 2815,1530 2955,1530 3033.48,1451.52 3033.48,1417.5 3055.98,1395 v1(3090,1395) ; R26.2@3155,1611.73 v1(3155,1675) ; R23.2@3155,1931.73 v1(3155,1990) ; R25.2@3160,1291.73 v1(3160,1360) ; C28.2@3510,3570 C32.2@3625,3570 ; v2(3745,2920) D20.1@3835.53,2920 ; v2(3750,3110) D19.1@3840.53,3110 ; v2(3750,3305) D18.1@3840.53,3305 ; v2(3750,3500) D17.1@3840.53,3500 ; v2(3755,3690) D16.1@3845.53,3690 ; v2(3755,3880) D15.1@3845.53,3880 ; v2(3755,4075) D14.1@3845.53,4075 ; D21.1@3835.53,2725 v2(3745,2725) 3745,2580 3785,2540 v2(3965,2540) ; C33.2@4025,2186.73 v3(3961.73,2186.73) 3961.73,2038.27 4150,1850 v1(4380,1850) ; v2(4050,2725) D6.1@4140.53,2725 ; v2(4050,2920) D7.1@4140.53,2920 ; v2(4055,3110) D8.1@4145.53,3110 ; v2(4055,3305) D9.1@4145.53,3305 ; v2(4055,3500) D10.1@4145.53,3500 ; v2(4060,3690) D11.1@4150.53,3690 ; v2(4060,3880) D12.1@4150.53,3880 ; v2(4060,4075) D13.1@4150.53,4075 ; C36.2@4680,3363.46 4870.04,3363.46 U5.1@4875,3368.43
  Bottom Layer w25: C39.1@3019.11,1395.03 v1(3090,1395) ; C41.1@3020,1335 3050,1335 v1(3090,1295) ; v1(3090,1395) 3125,1395 v1(3160,1360) 3160,1670 v1(3155,1675) v1(3155,1990) 3275,2110 3885,2110 v3(3961.73,2186.73) ; v2(3965,2540) 3965,2191.35 3961.73,2188.09 v3(3961.73,2186.73) ; U5.1@4875,3368.43 4710,3203.43 4710,2585 4660,2535 4485,2535 4390,2440 4390,2375 4201.73,2186.73 v3(3961.73,2186.73)
  Bottom Layer w50: S2.3@2170,4109.96 2285.04,4109.96 2395,4000 2395,3725
  other v1: 4425,1850 4470,1850
  other v2: 3505,3515 3560,3515 3615,3515
  other v3: 2240,3675 2395,3675 2475,3675
12V: C4.2 C5.2 R4.2 S1.3 TP1.1 U2.2 | length 163
  Top Layer w10: R4.2@1251.73,4090 1280,4090 1300,4070 1300,4065 1310,4055 1315,4055
  Top Layer w35: C5.2@1325.42,3610 U2.2@1407.7,3610
A_SCL: R17.1 U1.12 U6.4 | length 3544.9
  Top Layer w6: U1.12@3110.87,2780.24 3110.87,2719.13 3125,2705 3125,2620 3265,2480 4300,2480 4405,2585 4405,3700 v2@4360,3745 ; v2(4520,3710) 4555,3710 4652.38,3612.62 U6.4@4875,3612.62 4792.9,3694.72 R17.1@4683.46,3694.72
  Bottom Layer w6: v2(4365,3735) 4365.49,3734.51 4365.49,3714.51 4395,3685 4495,3685 v2(4520,3710)
A_SDA: R18.1 U1.11 U6.2 | length 3420.1
  Top Layer w6: U1.11@3095.12,2780.24 3095.12,2714.88 3110,2700 3110,2595 3245,2460 4310,2460 4430,2580 v2(4430,3730) ; v2(4525,3810) 4855,3810 4865.26,3799.74 4830.52,3765 R18.1@4683.46,3765
  Bottom Layer w6: v2(4430,3730) 4509.48,3809.47
ADC_GAS: U1.39 U5.4 | length 3838.4
  Top Layer w6: v1(2940,3315) 2984.88,3270.12 U1.39@2984.88,3059.76 ; v2(3385,3315) 3385,3880 3470,3965 3580,3965 3745,4130 4325,4130 4395,4060 v2(4405,4060) ; v2(4630,3575) 4615,3560 4615,3175 4716.85,3073.15 U5.4@4875,3073.15
  Bottom Layer w6: v1(2940,3315) v2(3385,3315) v2@3390,3310 ; v2(4405,4060) 4590,4060 4630,4020 v2(4630,3575)
ADC_LUX: U1.38 U8.1 | length 4157.5
  Top Layer w6: v1@2975,3345 v1(2975,3340.63) 3000.63,3315 U1.38@3000.63,3059.76 ; v2(3339.37,3340.63) 3339.37,3894.37 3440,3995 3565,3995 3720,4150 v2(4370,4150) ; v2(4585,3555) 4585,3010 4765,2830 U8.1@4875,2830
  Bottom Layer w6: v1(2975,3340.63) v2(3339.37,3340.63) ; v2(4370,4150) 4275,4055 4275,3635 4355,3555 v2(4585,3555)
C_RX1: U1.6 U9.11 | length 1871.8
  Top Layer w6: U1.6@3016.38,2780.24 3016.38,2673.62 3030,2660 3030,2485 v1(3065,2450)
  Top Layer w25: U9.11@2572.53,1226.3 v1(2572.53,1307.46)
  Bottom Layer w10: v1(2572.53,1307.46) 2572.53,1887.54 2790,2105 2790,2335 2905,2450 v1(3065,2450)
C_TX1: U1.7 U9.10 | length 1979.1
  Top Layer w6: U1.7@3032.13,2780.24 3032.13,2687.87 3050,2670 3050,2545 v1(3115,2480)
  Top Layer w25: U9.10@2493.8,1226.3 v1(2493.8,1313.8) v1@2495,1315
  Bottom Layer w10: v1(2493.8,1313.8) 2493.8,1873.8 2745,2125 2745,2335 2890,2480 v1(3115,2480)
CC1: R12.2 USB1.4 | length 98.3
  Top Layer w6: v3(4670,1510) 4670.2,1509.8 USB1.4@4720,1509.8
  Bottom Layer w6: R12.2@4621.73,1510 v3(4670,1510)
CC2: R13.2 USB1.10 | length 94.5
  Top Layer w6: v3(4670,1625) 4672.91,1627.91 USB1.10@4720,1627.91
  Bottom Layer w6: R13.2@4626.73,1625 v3(4670,1625)
D_GAS: U1.27 U5.3 | length 3794.1
  Top Layer w6: U1.27@3179.76,3006.61 3216.61,3006.61 3255,3045 3255,3995 3335,4075 3555,4075 3705,4225 v2(4420,4225) ; v2(4685,3580) 4645,3540 4645,3235 4708.43,3171.57 U5.3@4875,3171.57
  Bottom Layer w6: v2(4420,4225) 4625,4225 4685,4165 v2(4685,3580)
D_WS2812: D6.4 U1.4 | length 2062.8
  Top Layer w6: U1.4@2984.88,2780.24 2983.5,2778.85 2983.5,2496.5 3075,2405 4295,2405 v3(4297.5,2402.5) ; v2(4295,2585) 4250,2585 4235,2600 4235,2689.03 4270.97,2725 D6.4@4278.94,2725 4283.37,2725 D6.4@4300,2741.63
  Bottom Layer w6: v2(4295,2585) 4295,2405 v3(4297.5,2402.5)